# Altium PCB AutonomousVehicle_CurrentMeasure.PcbDoc
Units mm, origin at the board's own origin, x right, y up, seen from the top; angles counter-clockwise.
Board outline 60.86 x 88.75 mm, 2 copper layers (Top Layer, Bottom Layer); 74 components, 29 nets, 176 pads, 66 vias.
Unrouted connection lines stored in the file: 17.
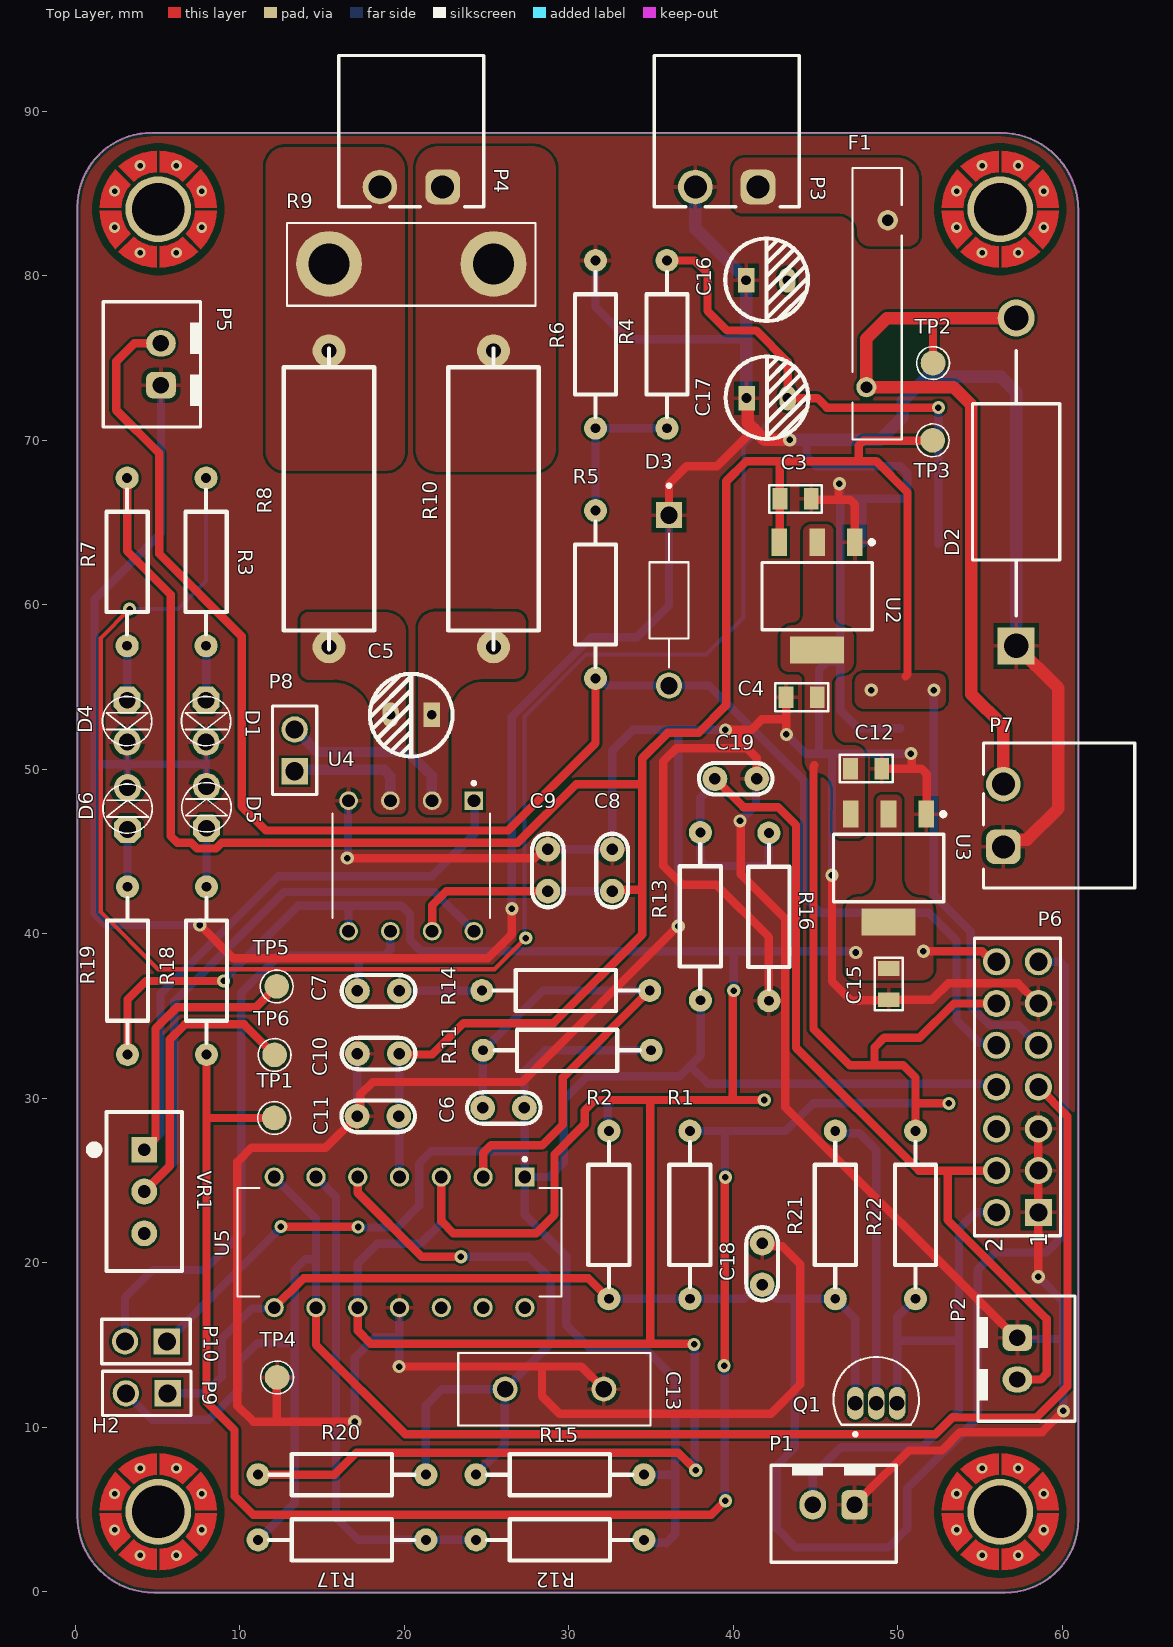
[diagram p0: Top Layer view]
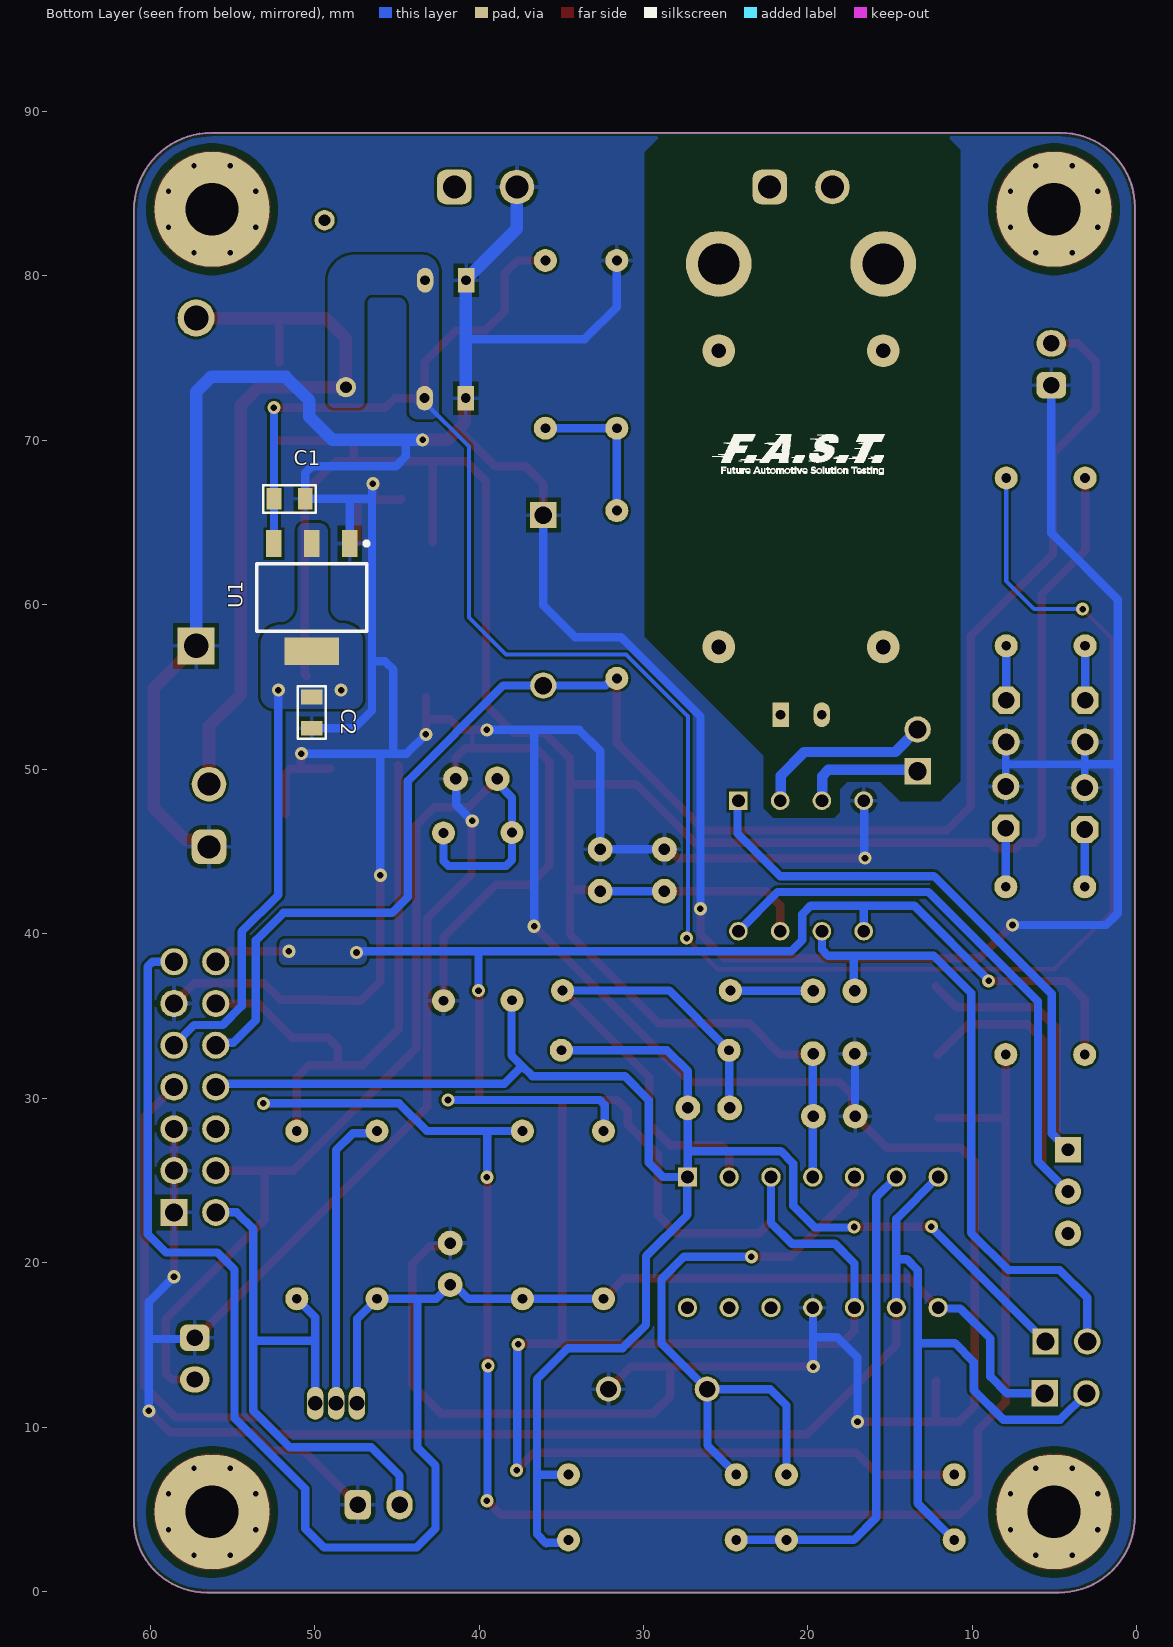
[diagram p1: Bottom Layer view, seen from below]
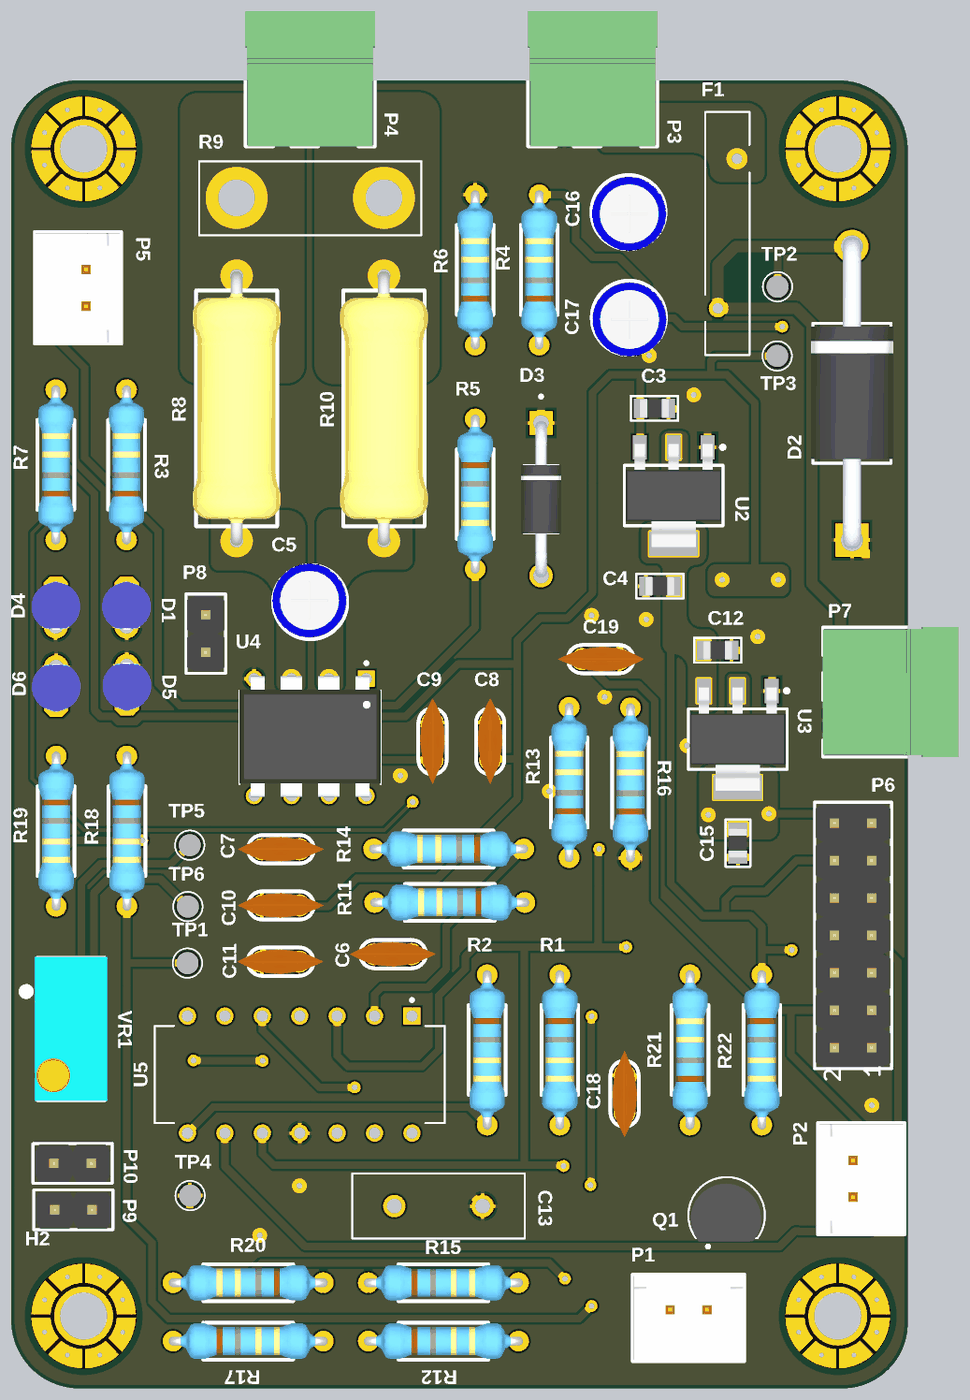
[diagram p2: 3D render of the assembled board from above, using the file's embedded part models]
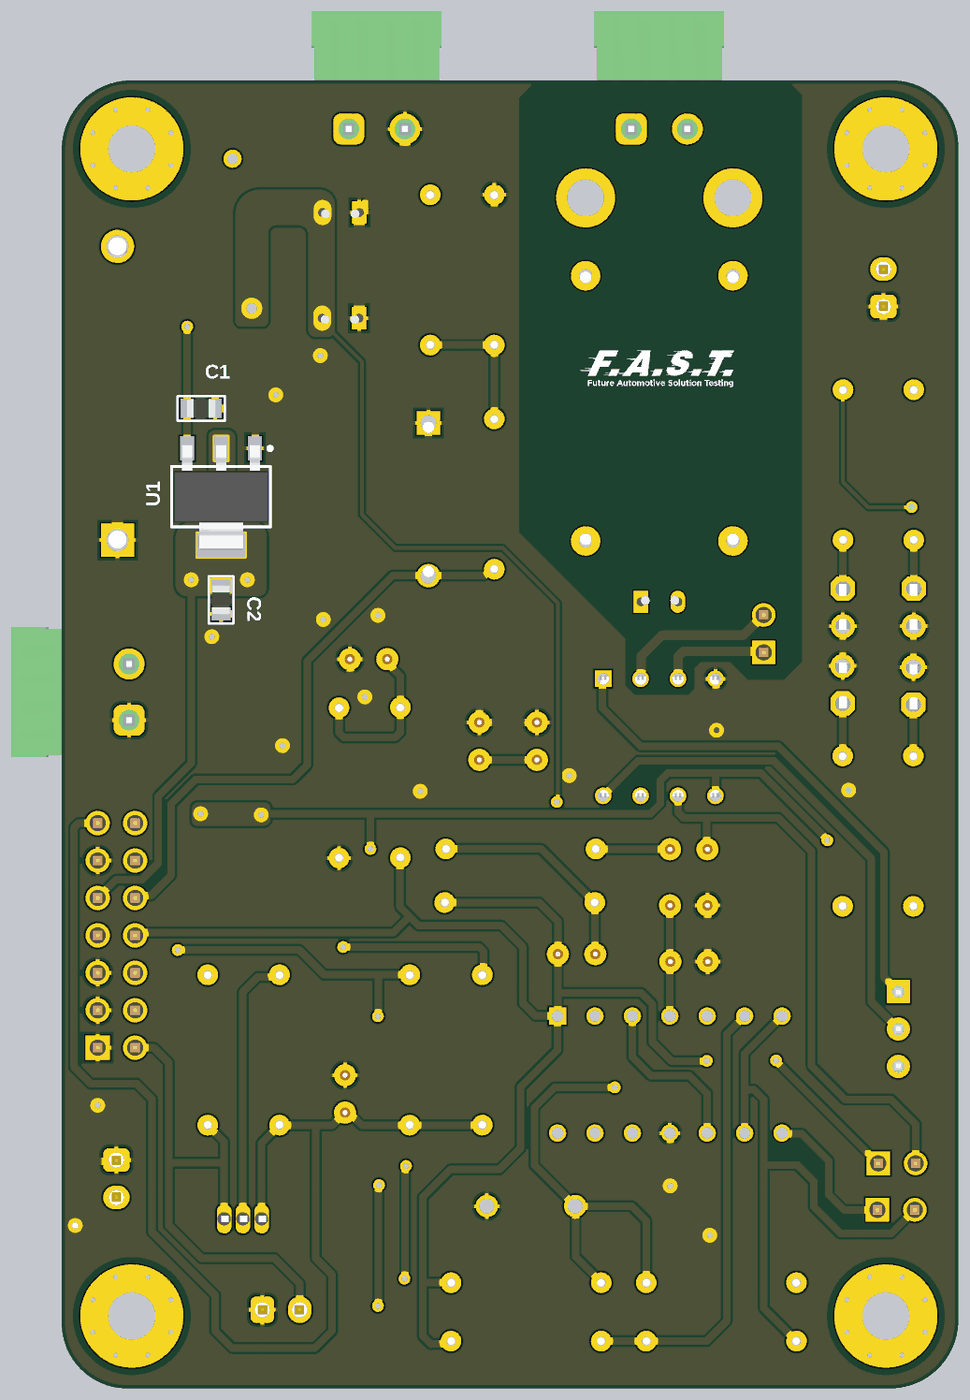
[diagram p3: 3D render of the assembled board from below, using the file's embedded part models]

## Layer stack, top to bottom
Top Solder: solder mask 0.0102, Solder Resist, Dk 3.5
Top Layer: signal copper 0.0356
Dielectric 1: dielectric 0.32, FR-4, Dk 4.8
Bottom Layer: signal copper 0.0356
Bottom Solder: solder mask 0.0102, Solder Resist, Dk 3.5

## Board outline
0.127,4.582 0.127,84.189 cw(c4.635,84.189) 4.635,88.697 8.509,88.697 56.259,88.697 cw(c56.259,83.971) 60.985,83.971 60.985,4.39 cw(c56.545,4.39) 56.545,-0.051 4.76,-0.051 cw(c4.76,4.582)

## Design rules (kind name [scope] priority, off if disabled: settings)
Clearance [All] p1: gap=0.15 ignorepadtopadclearanceinfootprint=FALSE
PolygonConnect PolygonConnect_GND [InNet('GND') vs InNet('GND')] p1: thpad.connectstyle=Relief thpad.reliefconductorwidth=0.254 thpad.reliefentries=4 thpad.polygonreliefangle="90 Angle" thpad.airgapwidth=0.254 smdpad.connectstyle=Relief smdpad.reliefconductorwidth=0.254 smdpad.reliefentries=4 smdpad.polygonreliefangle="90 Angle" smdpad.airgapwidth=0.254 via.connectstyle=Direct via.reliefconductorwidth=0.254 via.reliefentries=4 via.polygonreliefangle="90 Angle" via.airgapwidth=0.254
PolygonConnect [All] p2: connectstyle=Direct reliefconductorwidth=0.254 reliefentries=4 polygonreliefangle="90 Angle" airgapwidth=0.254
RoutingVias [All] p1: holewidth=0.4 width=0.8 viastyle="Through Hole" minholewidth=0.4 minwidth=0.8 maxholewidth=0.5 maxwidth=1
SolderMaskExpansion [All] p1: expansion=0.102 istentingtop=FALSE
Width [All] p1: maxlimit=0.762 minlimit=0.254 preferedwidth=0.508 minimp=50.000000 maximp=50.000000 favimp=50.000000
30 further rules are at their usual default settings.

## Classes and differential pairs
component class CurrentMeasure_ADCVoltage: C19 D1 D3 D4 D5 D6 P6 P8 P9 P10 Q1 R3 R4 R5 R6 R7 R13 R16 R18 R19 R21 R22
component class CurrentMeasure_PowerDistribution: C1 C2 C3 C4 C5 C12 C15 D2 F1 H1 H2 H4 P1 P2 P3 P4 P5 P7 R8 R9 R10 TP1 TP2 TP3 TP4 TP5 TP6 U1 U2 U3
component class CurrentMeasure_InputProcessing: C6 C7 C8 C9 C10 C11 C13 C18 R1 R2 R11 R12 R14 R15 R17 R20 U4 U5 VR1

## Components (designator, comment, footprint, x,y, rotation, side; value= is the part's Value field where it differs from the comment)
C1 "10 uF, 25 VDC" CAP_0805 51.545,66.418 r0 bottom
C2 "10 uF, 25 VDC" CAP_0805 50.195,53.479 r90 bottom
C3 "10 uF, 25 VDC" CAP_0805 43.764,66.421 r180 top
C4 "10 uF, 25 VDC" CAP_0805 44.186,54.407 r0 top
C5 "2.2uF 50V" CAP_4x7mm 21.666,53.32 r180 top
C6 "3.3nF 50V" CAP_RADIAL_2.54 27.28,29.413 r180 top
C7 "68nF 50V" CAP_RADIAL_2.54 19.668,36.531 r180 top
C8 "1uF 50V" CAP_RADIAL_2.54 32.639,42.619 r90 top
C9 "100nF 50V" CAP_RADIAL_2.54 28.727,42.619 r90 top
C10 "1uF 50V" CAP_RADIAL_2.54 19.668,32.718 r180 top
C11 "100nF 50V" CAP_RADIAL_2.54 19.643,28.905 r180 top
C12 "10 uF, 25 VDC" CAP_0805 48.057,50.013 r180 top
C13 "1.5nF, 100V" Mica_CAP 26.131,12.325 r0 top
C15 "10 uF, 25 VDC" CAP_0805 49.428,36.972 r90 top
C16 "100uF 16V" CAP_4x7mm 40.782,79.736 r0 top
C17 "47uF 25V" CAP_4x7mm 40.807,72.568 r0 top
C18 "0.1uF 50V" CAP_RADIAL_2.54 41.758,21.175 r270 top
C19 "100nF 50V" CAP_RADIAL_2.54 38.913,49.428 r0 top
D1 "LED" DIP_LED_3MM 7.951,54.204 r270 top
D2 "1N5822" DIODE_SCHOTTKY_DO-201AD 57.201,67.064 r90 top
D3 "1N4728A" 1N4728A_HoleDO-41 36.091,65.456 r270 top
D4 "LED" DIP_LED_3MM 3.15,54.204 r270 top
D5 "LED" DIP_LED_3MM 7.976,46.42 r90 top
D6 "LED" DIP_LED_3MM 3.176,46.344 r90 top
F1 "30V 4A" FUSERUEF400 48.819,78.689 r270 top
H1 "Hole" Hole_3.2mm 5.055,84.046 r0 top
H2 "Hole" Hole_3.2mm 5.055,4.851 r0 top
H3 "Hole" Hole_3.2mm 56.245,84.046 r0 top
H4 "Hole" Hole_3.2mm 56.245,4.851 r0 top
P1 "HDR_Terminal" HDR_Header_2.54 42.257,7.546 r270 top
P2 "HDR_Terminal" HDR_Header_2.54 55.015,10.329 r0 top
P3 "10A, 300V" 691322310002 39.599,88.804 r180 top
P4 "10A, 300V" 691322310002 20.422,88.804 r180 top
P5 "HDR_Terminal" HDR_Header_2.54 7.469,78.47 r180 top
P6 "61301421121" 61301421121 57.277,30.683 r90 top
P7 "10A, 300V" 691322310002 59.817,47.193 r90 top
P8 "61300211121" 61300211121 13.335,51.156 r90 top
P9 "61300211121" 61300211121 4.343,12.065 r180 top
P10 "61300211121" 61300211121 4.293,15.215 r180 top
Q1 "Mosfet_N_channel" TO-92 47.441,11.43 r0 top
R1 "10K 1/4W" RESISTOR-1/4W 37.313,22.86 r90 top
R2 "820 1/4W" RESISTOR-1/4W 32.385,22.86 r90 top
R3 "10 KOhm 1/4W" RESISTOR-1/4W 8.002,62.662 r270 top
R4 "10 KOhm 1/4W" RESISTOR-1/4W 36.017,75.89 r270 top
R5 "100 Ohm 1/4W" RESISTOR-1/4W 31.572,60.579 r90 top
R6 "3.3 KOhm 1/4W" RESISTOR-1/4W 31.674,75.89 r270 top
R7 "10 KOhm 1/4W" RESISTOR-1/4W 3.201,62.662 r270 top
R8 "10 Ohm, 1W" RESISTOR-1W 15.492,66.249 r270 top
R9 "2m Shunt" Shunt_Resistor 25.425,80.727 r180 top
R10 "10 Ohm, 1W" RESISTOR-1W 25.492,66.249 r270 top
R11 "47 KOhm 1/4W" RESISTOR-1/4W 29.845,32.969 r0 top
R12 "20 KOhm 1/4W" RESISTOR-1/4W 29.515,3.104 r180 top
R13 "33 KOhm 1/4W" RESISTOR-1/4W 38.049,41.108 r270 top
R14 "30 KOhm 1/4W" RESISTOR-1/4W 29.769,36.601 r0 top
R15 "20 KOhm 1/4W" RESISTOR-1/4W 29.515,7.067 r180 top
R16 "33 KOhm 1/4W" RESISTOR-1/4W 42.215,41.083 r270 top
R17 "1.1 MOhm 1/4W" RESISTOR-1/4W 16.261,3.104 r180 top
R18 "10 KOhm 1/4W" RESISTOR-1/4W 7.926,37.708 r90 top
R19 "10 KOhm 1/4W" RESISTOR-1/4W 3.125,37.708 r90 top
R20 "1.1 MOhm 1/4W" RESISTOR-1/4W 16.16,7.168 r0 top
R21 "10 KOhm 1/4W" RESISTOR-1/4W 46.253,22.962 r270 top
R22 "10 KOhm 1/4W" RESISTOR-1/4W 51.029,22.86 r90 top
TP1 "Test_Point" TP_1_5mm_SMD 12.141,28.829 r90 top
TP2 "Test_Point" TP_1_5mm_SMD 52.197,74.727 r90 top
TP3 "Test_Point" TP_1_5mm_SMD 52.172,70.028 r90 top
TP4 "Test_Point" TP_1_5mm_SMD 12.319,13.056 r90 top
TP5 "Test_Point" TP_1_5mm_SMD 12.294,36.83 r90 top
TP6 "Test_Point" TP_1_5mm_SMD 12.167,32.664 r90 top
U1 "AMS1117-5" AMS1117 50.059,57.11 r270 bottom
U2 "AMS1117-3.3" AMS1117 45.207,57.19 r270 top
U3 "AMS1117-2.5" AMS1117 49.551,40.66 r270 top
U4 "OPAMP_INA114" INA114AP 20.828,44.1 r270 top
U5 "IC_OPAMP_LM324N" LM324_DIP14 19.787,20.912 r270 top
VR1 "Resistor_Variable" RESISTOR_VARIABLE 4.166,26.873 r270 top

## Footprints (in the part's own frame and the unit in brackets; to place one, negate y for a bottom-side part, rotate by r counter-clockwise, add the part's x,y. Pads: shape width x height; smd on the part's side, far side on the other; paste and mask are expansions set on the pad)
1N4728A_HoleDO-41 [mm]
  rect 1.59x1.59 / inner round 1.59 / far side rect 1.59x1.59 hole 1.06: 1(0.004,0.002)
  round 1.59 hole 1.06: 2(10.364,0.002)
  silkscreen extent -1.89,-1.19 9.25,1.19, body extent -0.1,-1.36 10.47,1.36, height 2.72
61300211121 [mm] "Pin Header, pitch 2.54 mm, THT, Vertical, single row, 2p"
  rect 1.6x1.6 hole 1.1: 1(-1.27,0)
  round 1.6 hole 1.1: 2(1.27,0)
  silkscreen extent -2.69,-1.35 2.69,1.35, body extent -2.54,-1.27 2.54,1.27, height 8.57
61301421121 [mm] "Pin Header, pitch 2.54 mm, THT, Vertical, dual row, 14p"
  rect 1.65x1.65 hole 1.1: 1(-7.62,-1.27)
  round 1.65 hole 1.1: 2(-7.62,1.27) 3(-5.08,-1.27) 4(-5.08,1.27) 5(-2.54,-1.27) 6(-2.54,1.27) 7(0,-1.27) 8(0,1.27) 9(2.54,-1.27) 10(2.54,1.27) 11(5.08,-1.27) 12(5.08,1.27) 13(7.62,-1.27) 14(7.62,1.27)
  silkscreen extent -9.04,-2.62 9.04,2.62, body extent -8.89,-2.54 8.89,2.54, height 8.59
691322310002 [mm] "Horizontal PCB Header, pitch 3.81mm, 02p"
  rrect50% 2.1x2.1 hole 1.4: 1(-1.905,3.4)
  round 2.1 hole 1.4: 2(1.905,3.4)
  silkscreen extent -4.4,-4.6 4.41,4.6, body extent -4.4,-4.6 4.41,4.6, height 7.25
AMS1117 [mm]
  rect 1.65x0.95 smd: 1(-6.615,2.189) 2(-6.615,-0.111) 3(-6.615,-2.411)
  rect 1.65x3.3 smd: 4(-0.065,-0.111)
  silkscreen extent -6.74,-3.46 -1.29,3.34, body extent -6.84,-3.36 0.16,3.14, height 1.64
CAP_4x7mm [mm]
  rect 1x1.5 hole 0.6: 1(0,0)
  oval 1x1.5 hole 0.6: 2(2.5,0)
  silkscreen extent -1.27,-2.49 3.76,2.54, body extent -1.23,-2.62 3.82,2.43, height 11.81
CAP_0805 [mm]
  rect 0.9x1.3 smd: 1(-0.975,-0.025) 2(0.925,-0.025)
  silkscreen extent -1.63,-0.86 1.57,0.81, body extent -1.03,-0.65 0.97,0.6, height 0.6
CAP_RADIAL_2.54 [mm]
  round 1.5 hole 0.7: 1(-0.025,0) 2(2.515,0)
  silkscreen extent -1,-0.97 3.47,0.97, body extent -1.67,-0.85 4.17,0.85, height 6.12
DIODE_SCHOTTKY_DO-201AD [mm]
  rect 2.25x2.25 / inner round 2.25 / far side rect 2.25x2.25 hole 1.5: 1(-9.559,0)
  round 2.25 hole 1.5: 2(10.371,0)
  silkscreen extent -7.75,-2.65 8.38,2.65, body extent -10.14,-2.8 11.01,2.8, height 5.6
DIP_LED_3MM [mil]
  oct 65x65 hole 40: 1(0,0)
  round 65 hole 40: 2(100,0)
  silkscreen extent -9,-59 109,59, body extent -17,-65 109,65, height 184
FUSERUEF400 [mm] "RUEF400 30V 4A"
  round 1.228 hole 0.72: 1(-4.694,0.574) 2(5.456,-0.726)
  silkscreen extent -7.87,-1.58 8.63,1.42
HDR_Header_2.54 [mm]
  rrect50% 1.8x1.6 hole 1: 1(2.262,5.114)
  oval 1.8x1.6 hole 1: 2(2.262,2.574)
  silkscreen extent -0.15,0.03 5.76,7.65, body extent -0.09,0.14 5.66,7.54, height 7
Hole_3.2mm [mm]
  round 4 / inner round 7 / far side round 7 hole 3.2: 1(-0.014,0.006)
  Top Layer pour cut-out: -4.014,0.006 -3.71,1.537 -2.842,2.834 -1.545,3.701 -0.014,4.006 -0.014,4.006 1.517,3.701 2.814,2.834 3.681,1.537 3.986,0.006 3.986,0.006 3.682,-1.525 2.814,-2.822 1.517,-3.69 -0.014,-3.994 -0.014,-3.994 -1.545,-3.69 -2.842,-2.822 -3.71,-1.525 -4.014,0.006
  Top Layer region: -2.264,0.106 -2.239,0.331 -2.189,0.581 -2.114,0.806 -2.039,0.981 -1.964,1.131 -1.889,1.256 -1.789,1.381 -1.689,1.506 -2.614,2.431 -2.789,2.231 -2.939,2.031 -3.064,1.831 -3.189,1.606 -3.289,1.381 -3.364,1.181 -3.439,0.956 -3.489,0.731 -3.514,0.606 -3.539,0.456 -3.564,0.106
  Top Layer region: -2.264,-0.094 -2.239,-0.319 -2.189,-0.569 -2.114,-0.794 -2.039,-0.969 -1.964,-1.119 -1.889,-1.244 -1.789,-1.369 -1.689,-1.494 -2.614,-2.419 -2.789,-2.219 -2.939,-2.019 -3.064,-1.819 -3.189,-1.594 -3.289,-1.369 -3.364,-1.169 -3.439,-0.944 -3.489,-0.719 -3.514,-0.594 -3.539,-0.444 -3.564,-0.094
  Top Layer region: -0.114,2.256 -0.339,2.231 -0.589,2.181 -0.814,2.106 -0.989,2.031 -1.139,1.956 -1.264,1.881 -1.389,1.781 -1.514,1.681 -2.439,2.606 -2.239,2.781 -2.039,2.931 -1.839,3.056 -1.614,3.181 -1.389,3.281 -1.189,3.356 -0.964,3.431 -0.739,3.481 -0.614,3.506 -0.464,3.531 -0.114,3.556
  Top Layer region: 0.086,2.256 0.311,2.231 0.561,2.181 0.786,2.106 0.961,2.031 1.111,1.956 1.236,1.881 1.361,1.781 1.486,1.681 2.411,2.606 2.211,2.781 2.011,2.931 1.811,3.056 1.586,3.181 1.361,3.281 1.161,3.356 0.936,3.431 0.711,3.481 0.586,3.506 0.436,3.531 0.086,3.556
  Top Layer region: 2.236,-0.094 2.211,-0.319 2.161,-0.569 2.086,-0.794 2.011,-0.969 1.936,-1.119 1.861,-1.244 1.761,-1.369 1.661,-1.494 2.586,-2.419 2.761,-2.219 2.911,-2.019 3.036,-1.819 3.161,-1.594 3.261,-1.369 3.336,-1.169 3.411,-0.944 3.461,-0.719 3.486,-0.594 3.511,-0.444 3.536,-0.094
  Top Layer region: 2.236,0.106 2.211,0.331 2.161,0.581 2.086,0.806 2.011,0.981 1.936,1.131 1.861,1.256 1.761,1.381 1.661,1.506 2.586,2.431 2.761,2.231 2.911,2.031 3.036,1.831 3.161,1.606 3.261,1.381 3.336,1.181 3.411,0.956 3.461,0.731 3.486,0.606 3.511,0.456 3.536,0.106
  Top Layer region: 0.086,-2.244 0.311,-2.219 0.561,-2.169 0.786,-2.094 0.961,-2.019 1.111,-1.944 1.236,-1.869 1.361,-1.769 1.486,-1.669 2.411,-2.594 2.211,-2.769 2.011,-2.919 1.811,-3.044 1.586,-3.169 1.361,-3.269 1.161,-3.344 0.936,-3.419 0.711,-3.469 0.586,-3.494 0.436,-3.519 0.086,-3.544
  Top Layer region: -0.114,-2.244 -0.339,-2.219 -0.589,-2.169 -0.814,-2.094 -0.989,-2.019 -1.139,-1.944 -1.264,-1.869 -1.389,-1.769 -1.514,-1.669 -2.439,-2.594 -2.239,-2.769 -2.039,-2.919 -1.839,-3.044 -1.614,-3.169 -1.389,-3.269 -1.189,-3.344 -0.964,-3.419 -0.739,-3.469 -0.614,-3.494 -0.464,-3.519 -0.114,-3.544
  Bottom Layer pour cut-out: -4.014,0.006 -3.71,1.537 -2.842,2.834 -1.545,3.701 -0.014,4.006 -0.014,4.006 1.517,3.701 2.814,2.834 3.681,1.537 3.986,0.006 3.986,0.006 3.682,-1.525 2.814,-2.822 1.517,-3.69 -0.014,-3.994 -0.014,-3.994 -1.545,-3.69 -2.842,-2.822 -3.71,-1.525 -4.014,0.006
INA114AP [mm]
  rect 1.13x1.13 hole 0.78: 1(-3.995,3.404)
  round 1.13 hole 0.78: 2(-3.995,0.864) 3(-3.995,-1.676) 4(-3.995,-4.216) 5(3.945,-4.216) 6(3.945,-1.676) 7(3.945,0.864) 8(3.945,3.404)
  silkscreen extent -5.16,-5.2 3.15,4.39, body extent -4.17,-5.2 4.02,4.39, height 5.08
LM324_DIP14 [mm]
  rect 1.17x1.17 / inner round 1.17 / far side rect 1.17x1.17 hole 0.77: 1(-4.3,7.544)
  round 1.17 hole 0.77: 2(-4.3,5.004) 3(-4.3,2.464) 4(-4.3,-0.076) 5(-4.3,-2.616) 6(-4.3,-5.156) 7(-4.3,-7.696) 8(3.64,-7.696) 9(3.64,-5.156) 10(3.64,-2.616) 11(3.64,-0.076) 12(3.64,2.464) 13(3.64,5.004) 14(3.64,7.544)
  silkscreen extent -5.49,-9.92 2.97,9.77
Mica_CAP [mm]
  round 1.518 hole 1.01: 1(0,-0.006) 2(6,-0.006)
  silkscreen extent -2.85,-2.21 8.85,2.19
RESISTOR-1/4W [mm]
  round 1.4 hole 0.6: 1(-5.049,-0.051) 2(5.151,-0.051)
  silkscreen extent -4.34,-1.3 4.47,1.2, body extent -5.33,-1.25 5.43,1.15, height 2.41
RESISTOR-1W [mm]
  round 2 hole 0.9: 1(-9.197,-0.066) 2(8.803,-0.066)
  silkscreen extent -9.34,-2.82 8.95,2.68, body extent -9.49,-3.06 9.09,2.93, height 6.5
RESISTOR_VARIABLE [mil]
  rect 62x62 hole 31: 1(0,1)
  round 62 hole 31: 2(100,1) 3(200,1)
  silkscreen extent -90,-129 290,91, body extent -93,-96 293,98, height 459
Shunt_Resistor [mm]
  round 4 hole 2.5: 1(0,0) 2(10,0)
  silkscreen extent -2.54,-2.49 12.55,2.54
TO-92 [mm]
  oval 1x2 hole 0.9: 1(-0.019,0.025) 2(1.251,0.025) 3(2.521,0.025)
  silkscreen extent -1.35,-1.95 3.85,2.85, body extent -1.2,-1.52 3.6,2.42, height 7.74
TP_1_5mm_SMD [mm]
  round 1.5 smd: 1(-0.025,0.051)
  silkscreen extent -1.02,-0.95 0.97,1.05

## Part data
C1 C2 C3 C4 C12 C15: library part 0108051061025, "CAP, size 0805, 10 uF, 25 VDC", Capacitance="10 uF", Manufacture Name=TDK, Manufacture SN=CGA4J1X7S1E106K125AE, Operating Temperature="-55 to +125degC", Tolerance=+/-10%, Voltage Rating DC="25 VDC", ComponentLink2Description=Datasheet, ComponentLink2URL=https://product.tdk.com/system/files/dam/doc/product/capacitor/ceramic/mlcc/catalog/mlcc_automotive_soft_en.pdf?ref_disty=mouser, Mounting Technology=SMT, Packaging="Tape and Reel", Size=0805, Supplier 1 Name=Mouser, Supplier 1 SN=810-CGA4J1X7S1E106K2, Supplier 1 URL=https://www.mouser.vn/ProductDetail/TDK/CGA4J1X7S1E106K125AE?qs=PqoDHHvF64%252BJvhmUzM2odA%3D%3D&utm_source=mouser-refine-download&utm_medium=file&utm_campaign=CGA4J1X7S1E106K125AE&utm_content=TDK, Supplier 2 Name=Digi-Key, Supplier 2 SN=445-181411-2-ND, Supplier 2 URL=https://www.digikey.com/en/products/detail/tdk-corporation/cga4j1x7s1e106k125ae/9744777, Supplier 3 Name=thegioiic, Supplier 3 SN=OEM, Supplier 3 URL=https://www.thegioiic.com/tu-gom-0603-10uf-25v
C5: library part CAPCITOR_POLE, "Capacitor D4xL7 2.2uF 50V", URL=https://www.thegioiic.com/tu-hoa-2-2uf-50v-4x7mm-xuyen-lo
C6: library part Capacitor, "Capacitor, 3.3nF 50V", URL=https://www.thegioiic.com/tu-gom-tron-3-3nf-50v
C7: library part Capacitor, "Capacitor, 68nF 50V", URL=https://www.thegioiic.com/tu-gom-tron-68nf-50v
C8 C10: library part Capacitor, "Capacitor 1uF 50V", URL=https://www.thegioiic.com/tu-gom-multilayer-1uf-50v
C9 C11 C19: library part Capacitor, "Capacitor 100nF 50V", URL=https://www.thegioiic.com/tu-gom-tron-100nf-0-1uf-50v
C13: library part Capacitor, "Capacitor"
C16: library part CAPCITOR_POLE, "Capacitor D4xL7 100uF 16V", URL=https://www.thegioiic.com/tu-hoa-100uf-16v-5x11mm-xuyen-lo
C17: library part CAPCITOR_POLE, "Capacitor D4xL7 47uF 25V", URL=https://www.thegioiic.com/tu-hoa-47uf-25v-5x11mm-xuyen-lo
C18: library part Capacitor, "Capacitor, 0.1uF 50V", URL=https://www.thegioiic.com/tu-gom-tron-100nf-0-1uf-50v
D1 D4 D5 D6: "DIP LED Blue", URL=https://www.thegioiic.com/led-xanh-duong-3mm-chan-dai
D2: library part Diode_Schottky, "SS54 SMC Diode Schottky 5A 40V", URL=https://www.thegioiic.com/1n5822-diode-schottky-40v-3a-do-201ad
D3: library part Diode_Zener, "1N4728A Diode Zener 3.3V 1W  DO-41", URL=https://www.thegioiic.com/1n4728-diode-zener-3-3v-1w
F1: library part Fuse, "Fuse", URL=https://www.thegioiic.com/ruef400-cau-chi-tu-phuc-hoi-30v-4a
P1 P2 P5: "HDR_Terminal 2 pin", ComponentLink1Description=URL, ComponentLink1URL=https://www.thegioiic.com/kf128-2-v-domino-2-chan-thang-3-5mm-300v-10a-han-pcb, SUPPLIER=ThegioiIC
P3 P4 P7: library part 691322310002, "WR-TBL Series 322 Horizontal PCB Header, THT, pitch 3.81mm, 2p", Manufacturer="Wurth Elektronik", Operating Temperature Max=105°C, Operating Temperature Min=-40°C, Rated Current=10A, Working Voltage=300V, Application=Pluggable, Category="Terminal Blocks", ComponentLink1Description="Datasheet Link", ComponentLink1URL=https://www.we-online.com/redexpert/spec/691322310002?ad, ComponentLink2Description="Supplier 1 URL", ComponentLink2URL=N/A, ComponentLink3Description="Supplier 2 URL", ComponentLink3URL=N/A, ComponentLink4Description="Supplier 3 URL", ComponentLink4URL=https://www.thegioiic.com/kf-3-81-2-r-terminal-block-plug-in-han-pcb-2-chan-cong-3-81mm-300v-10a, Manufacturer Part Number=691322310002, Match Code=WR-TBL, Modularity=No, Mount="Through Hole", Number of Pins=2, Number of Rows=1, Orientation=Horizontal, Packaging=Box, Pitch=3.81mm, Supplier 1 Name=Mouser, Supplier 1 SN=N/A, Supplier 1 URL=N/A, Supplier 2 Name=Digi-Key, Supplier 2 SN=N/A, Supplier 2 URL=N/A, Supplier 3 Name=thegioiic, Supplier 3 SN=N/A, Supplier 3 URL=https://www.thegioiic.com/kf-3-81-2-r-terminal-block-plug-in-han-pcb-2-chan-cong-3-81mm-300v-10a
P6: "WR-PHD Pin Header, THT, pitch 2.54mm, Dual Row, Vertical, 14p", Contact Resistance=20mOhm, Manufacturer="Wurth Elektronik", Operating Temperature="-40 to +105degC", Rated Current=3A, Withstanding Voltage=500VAC, Working Voltage=250VAC, ComponentLink1Description=Manufacturer, ComponentLink1URL=http://www.we-online.de, ComponentLink2Description=Datasheet, ComponentLink2URL=https://www.we-online.com/catalog/datasheet/61301421121.pdf, ComponentLink3Description="Global Supply", ComponentLink3URL=https://www.we-online.com/en/components/products/PHD_2_54_THT_DUAL_PIN_HEADER_6130XX21121?sq=61301421121#61301421121, ComponentLink4Description="Global Supply", ComponentLink4URL=https://www.mouser.vn/ProductDetail/Wurth-Elektronik/61301421121?qs=PhR8RmCirEb6oOcq3uED2w%3D%3D, Gender="Pin Header", Manufacturer Part Number=61301421121, Mounting Technology=THT, Orientation=Vertical, Packaging=Bag, Pin Number=14, Pitch=2.54mm, Published Date="May 2020", Row Number=Dual, Supplier 1 Name=Mouser, Supplier 1 SN=710-61301421121, Supplier 1 URL=https://www.mouser.vn/ProductDetail/Wurth-Elektronik/61301421121?qs=PhR8RmCirEb6oOcq3uED2w%3D%3D, Supplier 2 Name=Digi-Key, Supplier 2 SN=N/A, Supplier 2 URL=N/A, Supplier 3 Name=thegioiic, Supplier 3 SN=N/A, Supplier 3 URL=N/A, Supply Name 1=Mouser
P8 P9 P10: "WR-PHD Pin Header, THT, pitch 2.54mm, Single Row, Vertical, 2p", Contact Resistance=20mOhm, Manufacturer="Wurth Elektronik", Operating Temperature="-40 to +105degC", Rated Current=3A, Withstanding Voltage=500VAC, Working Voltage=250VAC, ComponentLink1Description=Manufacturer, ComponentLink1URL=http://www.we-online.de, ComponentLink2Description=Datasheet, ComponentLink2URL=https://www.we-online.com/catalog/datasheet/61300211121.pdf, ComponentLink3Description="Global Supply", ComponentLink3URL=https://www.mouser.vn/ProductDetail/Wurth-Elektronik/61300211121?qs=t4813l51qx%252B1A5GYDQxPlw%3D%3D, Gender="Pin Header", Manufacturer Part Number=61300211121, Mounting Technology=THT, Orientation=Vertical, Packaging=Bag, Pin Number=2, Pitch=2.54mm, Published Date="May 2020", Row Number=Single, Supplier 1 Name=Mouser, Supplier 1 SN=710-61300211121, Supplier 1 URL=https://www.mouser.vn/ProductDetail/Wurth-Elektronik/61300211121?qs=t4813l51qx%252B1A5GYDQxPlw%3D%3D, Supplier 2 Name=Digi-Key, Supplier 2 SN=N/A, Supplier 2 URL=N/A, Supplier 3 Name=thegioiic, Supplier 3 SN=N/A, Supplier 3 URL=N/A, Supply Name 1=Mouser
Q1: "Mosfet_N_Channel"
R1: library part RESISTOR, "Resistor 10 KOhm 1/4W", Package=None, Availability=Unavailable, ComponentLink1Description=URL, ComponentLink1URL=https://www.thegioiic.com/dien-tro-10-kohm-1-4w-1-5-vong-mau, MP=NUCLEO-F401RE, Price=None
R2: library part RESISTOR, "Resistor 820 Ohm 1/4W", Package=None, Availability=Unavailable, ComponentLink1Description=URL, ComponentLink1URL=https://www.thegioiic.com/dien-tro-820-ohm-1-4w-1-5-vong-mau, MP=NUCLEO-F401RE, Price=None
R3 R4 R5 R6 R7 R11 R13 R14 R16 R18 R19 R21 R22: library part RESISTOR, Package=None, Availability=Unavailable, MP=NUCLEO-F401RE, Price=None
  R3 R4 R7 R18 R19 R21 R22: URL=https://www.thegioiic.com/dien-tro-10-kohm-1-4w-1-5-vong-mau
  R5: URL=https://www.thegioiic.com/dien-tro-100-ohm-1-4w-1-5-vong-mau
  R6: URL=https://www.thegioiic.com/dien-tro-3-3-kohm-1-4w-1-5-vong-mau
  R11: URL=https://www.thegioiic.com/dien-tro-47-kohm-1-4w-1-5-vong-mau
  R13 R16: URL=https://www.thegioiic.com/dien-tro-33-kohm-1-4w-1-5-vong-mau
  R14: URL=https://www.thegioiic.com/dien-tro-30-kohm-1-4w-1-5-vong-mau
R8 R10: library part RESISTOR, "Resistor 10 Ohm 1W 1%", Package=None, Availability=Unavailable, MP=NUCLEO-F401RE, Price=None, URL=https://www.thegioiic.com/dien-tro-10-ohm-1w-1-5-vong-mau
R9: library part RESISTOR, "Resistor 2m Ohm Shunt", Package=None, Availability=Unavailable, ComponentLink1Description=URL, ComponentLink1URL=https://icdayroi.com/dien-tro-shunt-0-002r-2mr, MP=NUCLEO-F401RE, Price=None
R12 R15: library part RESISTOR, "Resistor 20 KOhm 1/4W", Package=None, Availability=Unavailable, ComponentLink1Description=URL, ComponentLink1URL=https://www.thegioiic.com/dien-tro-20-kohm-1-4w-1-5-vong-mau, MP=NUCLEO-F401RE, Price=None
R17: library part RESISTOR, "Resistor 1.1 MOhm 1/4W", Package=None, Availability=Unavailable, ComponentLink1Description=URL, ComponentLink1URL=https://www.thegioiic.com/dien-tro-1-mohm-1-4w-1-5-vong-mau, MP=NUCLEO-F401RE, Price=None
R20: library part RESISTOR, "Resistor 1 MOhm 1/4W", Package=None, Availability=Unavailable, ComponentLink1Description=URL, ComponentLink1URL=https://www.thegioiic.com/dien-tro-1-mohm-1-4w-1-5-vong-mau, MP=NUCLEO-F401RE, Price=None
U1 U2 U3: library part AMS1117, "IC Linear Drop Out 3.3V 1A SOT-223"
  U1: URL=https://www.thegioiic.com/xblw-ams1117-5-0v-ic-on-ap-5v-1a-sot-223
  U2: URL=https://www.thegioiic.com/ams1117-3-3v-ic-on-ap-3-3v-1a-sot-223
  U3: URL=https://www.thegioiic.com/ams1117-2-5v-ic-on-ap-2-5v-1a-sot-223
U4: "INA114AP IC Instrumentation Amplifier 1MHZ, 8-DIP", URL=https://www.thegioiic.com/products?search=INA114
U5: "LM324N IC OPAMP General Purpose Amplifier 4 Circuit 1.2MHZ ,14-DIP", URL=https://www.thegioiic.com/lm324n-ic-opamp-general-purpose-amplifier-4-circuit-1-2mhz-14-dip
VR1: "Variable Resister, 3 pins, 10 KOhm"

## Via types
v1: diameter 0.8, hole 0.4, Top Layer to Bottom Layer, 34 vias
v2: diameter 0.66, hole 0.33, Top Layer to Bottom Layer, 32 vias

## Nets (pads, with @x,y where several pads share a name; then routed paths per layer and width w, separated by ;. In a path a pad name is that pad's centre, name@x,y a point inside that pad or via, vN(x,y) a via of type N, cw(c..) or ccw(c..) an arc to the next point about the centre after c; other vN are vias at no path point)
+2.5: C15.2 P6.14 R2.2 R19.1 R20.1 U3.2 U3.4 U4.5 U5.3 U5.10 | length 190.9
  Top Layer w0.508: R19.1 3.176,36.018 4.293,37.135 v1(9.017,37.135) ; R20.1 15.753,7.117 17.094,8.458 36.652,8.458 v1(37.719,7.391) ; U5.10 17.17,15.875 17.958,15.088 34.994,15.088 ; U5.3 22.25,22.53 22.987,21.793 28.016,21.793 29.134,22.911 29.134,26.594 30.963,28.423 30.963,29.261 31.598,29.896 34.95,29.896 ; v1(37.617,15.037) 37.567,15.088 34.994,15.088 ; v1(40.03,36.551) 39.98,36.5 39.98,30.117 39.758,29.896 ; v1(41.885,29.896) 39.98,29.896 39.758,29.896 ; v1(51.562,38.938) 55.138,38.938 55.773,38.303 P6.14 ; 34.95,29.896 34.95,15.131 34.994,15.088 ; 34.95,29.896 39.758,29.896
  Bottom Layer w0.508: v1(9.017,37.135) 9.017,37.186 13.538,41.707 16.612,41.707 19.837,41.707 20.345,41.199 20.345,39.624 21.031,38.938 39.954,38.938 ; U4.5 16.612,41.631 ; U5.10 17.17,19.964 18.364,21.158 20.98,21.158 22.25,22.428 U5.3 ; R2.2 32.36,28.087 32.36,29.598 32.657,29.896 v1@41.54,29.896 ; v1(37.617,15.037) 37.668,14.986 37.668,7.442 v1(37.719,7.391) ; v1(40.03,36.551) 40.03,38.862 39.954,38.938 ; v1(47.447,38.862) 47.391,38.918 47.185,38.918 47.165,38.938 39.954,38.938
+3.3: C4.2 C12.2 P6.12 R1.2 R18.1 R22.2 TP1.1 U2.2 U2.4 U3.3 | length 139.7
  Top Layer w0.508: R18.1 7.976,28.829 ; TP1.1 8.002,28.804 7.976,28.829 ; v1(39.446,13.741) 39.484,13.779 39.484,25.159 v1(39.522,25.197) ; v1(39.522,5.537) 38.659,4.674 10.82,4.674 9.677,5.817 9.677,9.83 7.976,11.531 7.976,28.829 ; 44.933,50.241 44.882,50.19 44.882,34.208 47.073,32.017 48.641,32.017 ; R22.2 51.079,29.693 ; v1(53.111,29.693) 51.079,29.693 ; P6.12 53.416,35.763 51.333,33.68 49.174,33.68 48.59,33.096 48.59,32.068 48.641,32.017 ; 48.641,32.017 50.33,32.017 51.079,31.267 51.079,29.693
  Bottom Layer w0.508: R1.2 39.497,28.011 ; v1(39.446,13.741) 39.484,13.703 39.484,5.575 v1(39.522,5.537) ; v1(39.522,25.197) 39.497,25.222 39.497,28.011 ; v1(53.111,29.693) 44.856,29.693 43.175,28.011 39.497,28.011
+5: C2.2 C3.2 C8.1 C9.1 C10.1 C11.1 P6.9 R7.1 TP3.1 U1.2 U1.4 U2.3 U4.7 U5.4 | length 183.6
  Top Layer w0.508: R7.1 3.15,63.271 5.791,60.63 5.791,45.949 6.198,45.542 7.045,45.542 7.396,45.191 8.557,45.191 8.908,45.542 26.899,45.542 30.459,49.103 34.468,49.103 ; C10.1 19.747,32.664 21.692,32.664 23.597,34.569 29.083,34.569 34.468,39.954 34.468,42.672 ; U4.7 21.692,41.732 22.553,42.594 C9.1 ; C8.1 32.717,42.672 34.468,42.672 ; U2.3 42.824,63.833 42.824,66.446 42.824,68.732 ; 50.47,55.651 50.597,55.778 50.597,66.827 48.692,68.732 47.625,68.732 ; TP3.1 52.095,69.977 47.923,69.977 47.625,69.679 47.625,68.732 ; 34.468,42.672 34.468,49.103 ; 34.468,49.103 34.468,50.673 36.017,52.222 37.897,52.222 39.573,53.899 39.573,67.513 40.792,68.732 42.824,68.732 ; 42.824,68.732 47.625,68.732
  Bottom Layer w0.508: C10.1 19.702,32.71 19.702,25.22 U5.4 ; C9.1 C8.1 ; v1(52.197,54.813) 52.197,42.367 54.432,40.132 54.432,35.6 55.58,34.452 57.318,34.452 P6.9
  other v1: 48.387,54.813
+VIN: C1.2 C16.2 C17.2 D2.2 F1.2 P7.2 R3.1 R4.1 TP2.1 U1.3 | length 179.7
  Top Layer w0.254: v1(3.302,59.741) 1.549,57.988 1.549,41.326 5.029,37.846 25.485,37.846 v1(27.381,39.742)
  Top Layer w0.508: R4.1 37.654,80.939 38.43,80.162 38.43,77.876 39.624,76.683 41.402,76.683 43.307,74.778 C17.2 45.11,72.568 45.688,71.99 v1(52.47,71.99) ; 52.121,77.436 52.146,77.41 TP2.1
  Top Layer w0.762: P7.2 56.417,52.625 54.483,54.559 54.483,72.136 53.386,73.233 F1.2 48.093,76.185 49.343,77.436 52.121,77.436 D2.2
  Bottom Layer w0.254: v1(3.302,59.741) 6.248,59.741 7.951,61.443 R3.1 ; v1(27.381,39.742) 27.305,39.818 27.305,53.224 31.053,56.972 38.354,56.972 40.615,59.233 40.615,69.625 43.307,72.318 C17.2
  Bottom Layer w0.508: U1.3 C1.2 v1(52.47,71.99)
GND: C1.1 C2.1 C3.1 C4.1 C8.2 C9.2 C10.2 C11.2 C12.1 C13.2 C15.1 C16.1 C17.1 C18.1 C19.2 D1.2 D2.1 D3.1 D4.2 D5.2 D6.2 P1.1 P2.1 P3.2 P5.1 P6.1 P6.3 P6.5 P6.11 P7.1 R6.1 R16.2 TP4.1 U1.1 U2.1 U3.1 U4.4 U5.11 | length 550.2
  Top Layer w0.254: 40.393,51.283 40.393,52.356 40.437,52.4
  Top Layer w0.508: v1(7.569,40.538) 9.601,38.506 25.07,38.506 26.538,39.975 v1(26.538,41.528) ; TP4.1@12.192,12.827 12.243,12.776 12.243,10.338 ; v1(16.535,44.602) 26.889,44.602 27.934,44.602 28.465,45.134 C9.2 ; v1(16.993,10.338) 12.243,10.338 ; v1(19.685,13.691) 28.372,13.691 ; C13.2 30.759,13.691 28.372,13.691 ; D3.1 36.093,67.361 37.16,68.428 39.014,68.428 41.262,70.675 ; v1(36.652,40.462) 27.178,30.988 18.085,30.988 17.318,30.221 17.318,29.095 C11.2 15.223,27 10.719,27 9.855,26.137 9.855,11.303 10.82,10.338 12.243,10.338 ; v1(39.522,52.4) 40.437,52.4 41.097,52.4 41.732,53.035 43.144,53.035 43.221,52.959 ; v1(40.411,46.863) 40.462,46.812 40.462,43.612 43.155,40.919 43.155,29.466 57.177,15.443 P2.1 ; C19.2 41.427,50.698 40.843,51.283 40.393,51.283 36.551,51.283 35.738,50.47 35.738,44.145 36.906,42.977 38.989,42.977 42.164,39.802 R16.2 ; C18.1 41.947,21.01 42.972,21.01 44.069,19.914 44.069,12.598 42.291,10.82 29.439,10.82 28.372,11.887 28.372,13.691 ; C4.1 43.221,54.371 43.221,52.959 ; v1(43.231,52.121) 43.221,52.131 43.221,52.959 ; C3.1 44.79,66.396 46.401,66.396 ; v1(45.999,43.561) 45.999,37.109 47.168,35.941 47.676,35.941 47.704,35.969 49.426,35.969 C15.1 52.075,35.997 53.07,36.992 57.318,36.992 P6.11 ; v1(46.457,67.361) 46.401,67.305 46.401,66.396 ; P1.1 47.371,5.304 47.906,5.839 47.927,5.839 50.673,8.585 52.68,8.585 53.797,9.703 58.776,9.703 v1(60.071,10.998) ; U2.1 47.396,66.091 47.092,66.396 46.401,66.396 ; C12.1 51.435,50.038 51.765,49.708 51.765,47.3 U3.1 ; v1(50.8,50.952) 50.846,50.907 50.846,50.038 ; v1(58.547,19.152) P6.1 P6.3 P6.5
  Top Layer w0.762: C17.1 40.869,72.506 40.869,71.069 41.262,70.675 41.903,70.035 43.427,70.035 v1(43.434,70.028) ; P7.1 56.853,45.724 57.866,45.724 59.766,47.625 59.766,54.94 D2.1
  Bottom Layer w0.457: D4.2 3.163,51.651 3.163,50.274 ; D6.2 3.163,48.897 3.163,50.274 ; D1.2 7.964,51.651 7.964,50.312 ; D5.2 7.964,48.973 7.964,50.312 ; 3.163,50.274 3.201,50.312 7.964,50.312
  Bottom Layer w0.508: 3.163,50.274 3.12,50.317 1.168,50.317 ; P5.1 5.207,64.364 1.168,60.325 1.168,50.317 ; v1(7.569,40.538) 1.88,40.538 1.168,41.25 1.168,50.317 ; v1(16.535,44.602) 16.573,44.64 16.573,48.057 U4.4 ; v1(16.993,10.338) 16.993,14.249 18.224,15.481 19.698,15.481 ; C11.2 17.141,28.918 17.141,32.705 C10.2 ; v1(19.685,13.691) 19.698,13.703 19.698,15.481 ; U5.11 19.698,17.259 19.698,15.481 ; v1(26.538,41.528) 26.538,53.208 31.369,58.039 34.163,58.039 36.093,59.969 D3.1 ; C9.2 C8.2 32.639,51.13 33.909,52.4 36.716,52.4 ; R6.1 31.623,78.105 33.576,76.152 40.794,76.152 ; v1(36.652,40.462) 36.652,52.337 36.716,52.4 ; v1(39.522,52.4) 36.716,52.4 ; v1(40.411,46.863) 41.386,47.837 41.386,49.387 C19.2 ; v1(43.231,52.121) 44.399,50.952 45.212,50.952 ; 44.45,70.028 44.45,69.037 45.06,68.428 50.165,68.428 50.57,68.023 C1.1 47.854,66.443 ; v1(45.999,43.561) 45.999,50.927 46.025,50.952 ; v1(46.457,67.361) 46.507,67.31 46.507,56.566 ; 46.609,66.443 47.854,66.443 ; U1.1 47.854,63.741 47.854,66.443 ; C2.1 47.573,52.503 46.507,53.569 46.507,56.566 ; v1(50.8,50.952) 46.025,50.952 ; P2.1 57.353,15.367 60.071,15.367 ; v1(58.547,19.152) 60.071,17.628 60.071,15.367 ; v1(60.071,10.998) 60.071,15.367 ; 45.212,50.952 46.025,50.952 ; 45.212,50.952 45.212,56.058 45.72,56.566 46.507,56.566
  Bottom Layer w0.762: P3.2 37.694,82.88 40.469,80.105 40.663,80.105 40.782,79.986 C16.1 40.794,79.723 40.794,76.152 40.794,72.581 C17.1 ; v1(43.434,70.028) 44.45,70.028 48.92,70.028 50.317,71.425 50.317,72.415 51.765,73.863 56.286,73.863 57.201,72.949 D2.1
NetC5_1: C5.1 P8.2 R10.2 U4.2 | length 11
  Bottom Layer w0.635: P8.2 14.707,51.054 20.218,51.054 21.66,49.613 21.66,48.127 U4.2
NetC5_2: C5.2 P8.1 R8.2 U4.3 | length 7.5
  Bottom Layer w0.635: P8.1 13.411,49.962 18.773,49.962 19.145,49.59 19.145,48.102 U4.3
NetC6_1: C6.1 P6.8 P10.1 R11.2 R12.1 R13.2 R15.1 U5.1 | length 112.9
  Top Layer w0.508: v1(12.497,22.2) 12.509,22.187 17.183,22.187 v1(17.196,22.174)
  Bottom Layer w0.508: P10.1 12.497,22.149 v1(12.497,22.2) ; v1(17.196,22.174) 17.221,22.149 19.583,22.149 20.904,23.47 20.904,26.035 21.652,26.783 27.318,26.783 ; R12.1 34.735,2.984 35.878,2.984 35.916,2.946 36.474,3.505 36.474,7.239 ; R15.1 36.353,7.117 36.474,7.239 ; R11.2 28.575,32.918 27.305,31.648 C6.1 27.318,29.4 27.318,26.783 ; R13.2 38.024,35.932 38.024,32.614 37.376,31.966 ; P6.8 55.804,30.886 38.456,30.886 37.376,31.966 ; 27.318,26.783 27.318,25.225 U5.1 ; U5.1 28.819,25.212 29.693,26.086 29.693,29.896 31.14,31.344 36.754,31.344 37.376,31.966 ; U5.1 27.33,22.911 29.845,20.396 29.845,16.231 31.267,14.808 34.595,14.808 36.474,12.929 36.474,7.239
NetC6_2: C6.2 R11.1 R14.2 U5.2 | length 32.5
  Top Layer w0.508: U5.2 24.79,26.67 25.273,27.153 28.397,27.153 29.642,28.397 29.642,31.273 R14.2
  Bottom Layer w0.508: C6.2 24.78,29.429 24.78,32.903 R11.1 28.428,36.551 R14.2
NetC7_1: C7.1 R14.1 | length 4.6
  Bottom Layer w0.508: C7.1@20.142,36.531 20.152,36.541 24.71,36.541 R14.1
NetC7_2: C7.2 P10.2 U4.6 | length 39.3
  Bottom Layer w0.508: P10.2 3.023,17.882 4.699,19.558 7.823,19.558 10.084,21.819 10.084,36.398 12.344,38.659 17.221,38.659 18.771,38.659 19.152,39.04 U4.6 ; C7.2 17.221,36.598 17.221,38.633
NetC13_1: C13.1 R15.2 R20.2 U5.5 | length 38.1
  Top Layer w0.508: U5.5 17.17,24.257 21.057,20.371 v1(23.444,20.371)
  Bottom Layer w0.508: R20.2 21.311,11.328 22.301,12.319 C13.1@26.111,12.319 ; v1(23.444,20.371) 27.534,20.371 28.905,18.999 28.905,15.093 C13.1 C13.1@26.111,12.319 ; R15.2 24.364,7.155 26.111,8.902 C13.1@26.111,12.319
NetC18_2: C18.2 P6.13 P9.1 Q1.1 R1.1 R2.1 R21.2 U5.8 | length 117.9
  Top Layer w0.508: U5.8 13.868,19.05 31.197,19.05 R2.1
  Bottom Layer w0.508: P9.1 7.899,12.065 8.915,13.081 8.915,15.392 10.743,17.22 12.039,17.22 U5.8 ; R2.1 R1.1 40.64,17.811 41.489,18.66 C18.2 42.607,17.811 43.739,17.811 ; Q1.1 47.422,16.592 R21.2 43.739,17.811 ; P6.13 59.85,38.303 60.147,38.006 60.147,21.742 59.03,20.625 55.905,20.625 54.864,19.583 54.864,10.566 50.571,6.274 50.571,3.835 49.428,2.692 43.79,2.692 42.647,3.835 42.647,7.671 43.739,8.763 43.739,17.811
NetC19_1: C19.1 P2.2 P6.4 R13.1 R16.1 | length 63.2
  Top Layer w0.508: C19.1 40.615,47.701 42.723,47.701 43.813,46.611 43.813,33.073 51.283,25.603 53.035,25.603 ; P6.4 53.035,25.603 ; P2.2 58.699,12.903 59.055,13.259 59.055,16.593 53.035,22.613 53.035,25.603
  Bottom Layer w0.508: C19.1 38.887,49.16 37.998,48.271 R13.1 37.998,44.475 38.354,44.12 41.866,44.12 42.164,44.417 R16.1
NetD1_1: D1.1 R3.2 | length 3.3
  Bottom Layer w0.508: D1.1 R3.2
NetD3_2: D3.2 P5.2 P6.10 R5.1 | length 102.2
  Top Layer w0.508: P5.2 3.581,75.895 2.489,74.803 2.489,71.831 5.105,69.215 5.105,63.094 10.109,58.09 10.109,47.752 11.582,46.279 26.314,46.279 31.623,51.587 R5.1
  Bottom Layer w0.508: R5.1 31.864,55.53 32.302,55.093 D3.2 38.532,55.093 44.323,49.301 44.323,42.24 45.288,41.275 51.892,41.275 53.569,39.599 53.569,34.747 54.936,33.38 55.85,33.38 P6.10
NetD4_1: D4.1 R7.2 | length 3.3
  Bottom Layer w0.508: D4.1 R7.2
NetD5_1: D5.1 R18.2 | length 3.6
  Bottom Layer w0.508: R18.2 D5.1
NetD6_1: D6.1 R19.2 | length 3.5
  Bottom Layer w0.508: R19.2 D6.1
NetF1_1: F1.1 P3.1
NetP1_2: P1.2 P6.2 Q1.3 R22.1 | length 36.6
  Bottom Layer w0.508: P1.2 44.831,7.061 46.558,8.788 51.511,8.788 53.721,10.998 53.721,15.265 ; Q1.3 49.962,15.265 ; R22.1 49.962,16.693 49.962,15.265 ; P6.2 54.737,23.063 53.721,22.047 53.721,15.265 ; 49.962,15.265 53.721,15.265
NetP4_1: P4.1 R9.1 R10.1
NetP4_2: P4.2 R8.1 R9.2
NetP6_7: P6.7 P9.2 R17.2 U5.7 U5.9 | length 112.2
  Top Layer w0.508: U5.9 14.63,15.011 20.066,9.576 52.299,9.576 53.333,10.61 53.601,10.61 53.619,10.592 58.445,10.592 60.325,12.471 60.325,28.905 P6.7
  Bottom Layer w0.508: P9.2 4.674,10.465 8.128,10.465 9.931,12.268 9.931,13.97 11.074,15.113 13.233,15.113 13.335,15.215 ; R17.2 13.335,5.379 13.335,15.215 ; U5.7@12.004,25.212 U5.7 14.63,22.672 14.63,20.193 ; U5.9 14.63,20.193 ; 13.335,15.215 13.335,19.558 13.995,20.218 14.605,20.218 14.63,20.193
NetQ1_2: Q1.2 R21.1 | length 18.4
  Bottom Layer w0.508: R21.1 46.338,27.875 47.665,27.875 48.692,26.848 Q1.2
NetR4_2: R4.2 R5.2 R6.2 | length 9.4
  Bottom Layer w0.508: R5.2 R6.2 R4.2
NetR12_2: R12.2 R17.1 U5.6 | length 30.3
  Bottom Layer w0.508: U5.6 15.85,23.993 15.85,4.521 17.216,3.155 R17.1 R12.2
NetTP5_1: TP5.1 U4.1 VR1.1 | length 51.1
  Top Layer w0.508: VR1.1 4.877,27.559 4.877,34.239 6.172,35.535 10.973,35.535 TP5.1
  Bottom Layer w0.508: VR1.1 5.182,27.864 5.182,36.347 12.344,43.51 21.692,43.51 24.282,46.101 24.282,48.044 U4.1
NetTP6_1: TP6.1 U4.8 VR1.2 | length 51.7
  Top Layer w0.508: VR1.2 5.74,25.883 5.74,33.579 6.655,34.493 10.262,34.493 TP6.1
  Bottom Layer w0.508: VR1.2 6.02,26.162 6.02,35.89 12.675,42.545 21.842,42.545 U4.8
pads on no net: H1.1 H2.1 H3.1 H4.1 P6.6 U5.12 U5.13 U5.14 VR1.3
copper on no net:
  other v2: 3.941,2.207 6.141,2.207 55.131,2.207 57.331,2.207 2.391,3.757 7.691,3.757 53.581,3.757 58.881,3.757 2.391,5.957 7.691,5.957 53.581,5.957 58.881,5.957 3.941,7.507 6.141,7.507 55.131,7.507 57.331,7.507 3.941,81.402 6.141,81.402 55.131,81.402 57.331,81.402 2.391,82.952 7.691,82.952 53.581,82.952 58.881,82.952 2.391,85.152 7.691,85.152 53.581,85.152 58.881,85.152 3.941,86.702 6.141,86.702 55.131,86.702 57.331,86.702

## Polygon pours and split planes (outlines as drawn)
GND on Top Layer "GND" (solid, remove dead copper, pour order 15): 60.909,88.849 60.909,0 0,0 0,88.738 4.44,88.738
NetP4_1 on Top Layer "NetP4_1" (solid, remove dead copper, pour order 0): 22.047,87.884 ccw(c22.047,86.538) 20.701,86.538 20.701,69.418 ccw(c22.022,69.418) 22.022,68.097 27.788,68.097 ccw(c27.788,69.52) 29.21,69.52 29.21,86.462 ccw(c27.788,86.462) 27.788,87.884
NetP4_2 on Top Layer "NetP4_2" (solid, remove dead copper, pour order 1): 18.618,87.833 cw(c18.618,86.411) 20.041,86.411 20.041,69.342 cw(c18.847,69.342) 18.847,68.148 12.751,68.148 cw(c12.751,69.317) 11.582,69.317 11.582,86.665 cw(c12.751,86.665) 12.751,87.833
NetC5_1 on Top Layer "NetC5_1" (solid, remove dead copper, pour order 3): 25.349,59.588 21.869,59.588 ccw(c21.869,58.572) 20.853,58.572 20.853,47.854 ccw(c21.463,47.854) 21.463,47.244 22.2,47.244 ccw(c22.2,47.727) 22.682,47.727 22.682,53.365 cw(c24.816,53.365) 24.816,55.499 26.721,55.499 ccw(c26.721,56.159) 27.381,56.159 27.381,58.934 ccw(c26.731,58.934) 26.731,59.584
NetC5_2 on Top Layer "NetC5_2" (solid, remove dead copper, pour order 4): 18.872,59.538 cw(c18.872,58.318) 20.091,58.318 20.091,47.6 cw(c19.761,47.6) 19.761,47.269 18.618,47.269 cw(c18.618,47.752) 18.136,47.752 18.136,53.035 ccw(c15.723,53.035) 15.723,55.448 14.199,55.448 cw(c14.199,55.956) 13.691,55.956 13.691,59.106 cw(c14.122,59.106) 14.122,59.538
+2.5 on Top Layer "+2.5" (solid, remove dead copper, pour order 13): 49.711,48.446 49.903,48.446 cw(c49.903,48.108) 50.241,48.108 50.241,43.358 ccw(c51.41,43.358) 51.41,42.189 cw(c51.41,41.427) 52.172,41.427 52.172,37.871 cw(c51.486,37.871) 51.486,37.186 47.447,37.186 cw(c47.447,37.821) 46.812,37.821 46.812,41.478 cw(c47.574,41.478) 47.574,42.24 ccw(c47.574,43.358) 48.692,43.358 48.692,48.108 cw(c49.03,48.108) 49.03,48.446
+3.3 on Top Layer "+3.3" (solid, remove dead copper, pour order 11): 45.644,64.897 cw(c45.644,64.465) 46.076,64.465 46.076,59.258 ccw(c46.711,59.258) 46.711,58.623 cw(c46.711,58.014) 47.32,58.014 47.32,56.54 cw(c46.609,56.54) 46.609,55.829 ccw(c46.609,55.194) 45.974,55.194 45.974,52.426 ccw(c46.939,52.426) 46.939,51.46 47.346,51.46 cw(c47.346,50.8) 48.006,50.8 48.006,46.304 cw(c47.523,46.304) 47.523,45.822 46.584,45.822 cw(c46.584,46.355) 46.05,46.355 46.076,48.743 ccw(c45.034,48.743) 45.034,49.784 cw(c45.034,50.47) 44.348,50.47 44.348,55.474 ccw(c43.891,55.474) 43.891,55.931 43.383,55.931 cw(c43.383,56.439) 42.875,56.439 42.875,58.039 cw(c43.586,58.039) 43.586,58.75 ccw(c43.586,59.411) 44.247,59.411 44.247,64.389 cw(c44.755,64.389) 44.755,64.897
+5 on Top Layer "+5" (solid, remove dead copper, pour order 10): 52.934,55.016 52.934,55.321 ccw(c52.4,55.321) 52.4,55.855 47.955,55.855 ccw(c47.943,55.309) 47.397,55.321 47.397,54.253 ccw(c47.955,54.253) 47.955,53.696 52.376,53.696 ccw(c52.376,54.253) 52.934,54.253
NetF1_1 on Top Layer "NetF1_1" (solid, remove dead copper, pour order 5): 50.013,87.173 cw(c50.013,85.903) 51.283,85.903 51.283,82.448 cw(c50.648,82.448) 50.648,81.813 48.311,81.813 cw(c48.311,82.575) 47.549,82.575 47.549,82.652 ccw(c46.406,82.652) 46.406,83.795 40.538,83.795 cw(c40.538,84.353) 39.98,84.353 39.98,86.487 cw(c40.665,86.487) 40.665,87.173
+VIN on Bottom Layer "+VIN" (solid, remove dead copper, pour order 7): 47.371,71.984 cw(c47.371,72.39) 46.965,72.39 46.965,78.359 ccw(c46.457,78.359) 46.457,78.867 44.907,78.867 ccw(c44.907,78.207) 44.247,78.207 44.247,71.78 cw(c43.764,71.78) 43.764,71.298 42.901,71.298 cw(c42.901,71.755) 42.443,71.755 42.443,80.264 cw(c43.459,80.264) 43.459,81.28 47.574,81.28 cw(c47.574,79.654) 49.2,79.654 49.2,72.39 cw(c48.793,72.39) 48.793,71.984
GND on Bottom Layer "GND" (solid, remove dead copper, pour order 16): 60.884,88.925 60.884,-0.254 0.102,-0.254 0.102,88.925
+2.5 on Bottom Layer "+2.5" (solid, remove dead copper, pour order 14): 51.765,39.7 cw(c51.765,39.319) 52.146,39.319 52.146,38.43 cw(c51.841,38.43) 51.841,38.125 47.269,38.125 cw(c47.269,38.583) 46.812,38.583 46.812,39.294 cw(c47.219,39.294) 47.219,39.7
+5 on Bottom Layer "+5" (solid, remove dead copper, pour order 9): 50.571,64.973 cw(c50.571,64.516) 51.029,64.516 51.029,59.868 ccw(c52.121,59.868) 52.121,58.776 cw(c52.121,57.633) 53.264,57.633 53.264,54.483 cw(c52.476,54.483) 52.476,53.696 47.65,53.696 cw(c47.65,54.28) 47.066,54.28 47.066,57.683 cw(c48.26,57.683) 48.26,58.877 ccw(c48.26,59.817) 49.2,59.817 49.2,64.44 cw(c49.733,64.44) 49.733,64.973

## Keep-outs
Keep-Out Layer:
  lines w0.127: 0.127,4.582 ccw(c4.76,4.582) 4.76,-0.051 56.545,-0.051 ccw(c56.545,4.39) 60.985,4.39 60.985,14.007 60.985,83.971 ccw(c56.259,83.971) 56.259,88.697 8.509,88.697 4.635,88.697 ccw(c4.635,84.189) 0.127,84.189 0.127,14.18 0.127,4.582

## Other copper
Bottom Layer:
  pour cut-out: 11.659,88.621 10.719,87.681 10.719,49.276 11.963,48.031 14.402,48.031 15.596,49.225 17.602,49.225 18.034,48.793 18.034,47.396 18.415,47.015 22.123,47.015 22.733,47.625 22.733,50.835 29.947,58.048 29.947,87.528 28.854,88.621

## Silkscreen, mask and mechanical layers (free items; w line width, h text height)
Bottom Overlay:
  drawing of 42 lines, arcs and shapes, not listed

## Text inside footprints (layer, text, board x,y; h text height)
P6: Top Overlay "1" at 59.077,20.933 h1.02 r90; Top Overlay "2" at 56.377,20.633 h1.02 r90